# EAGLE board connectionBoxPCB (EAGLE 8.5.2)
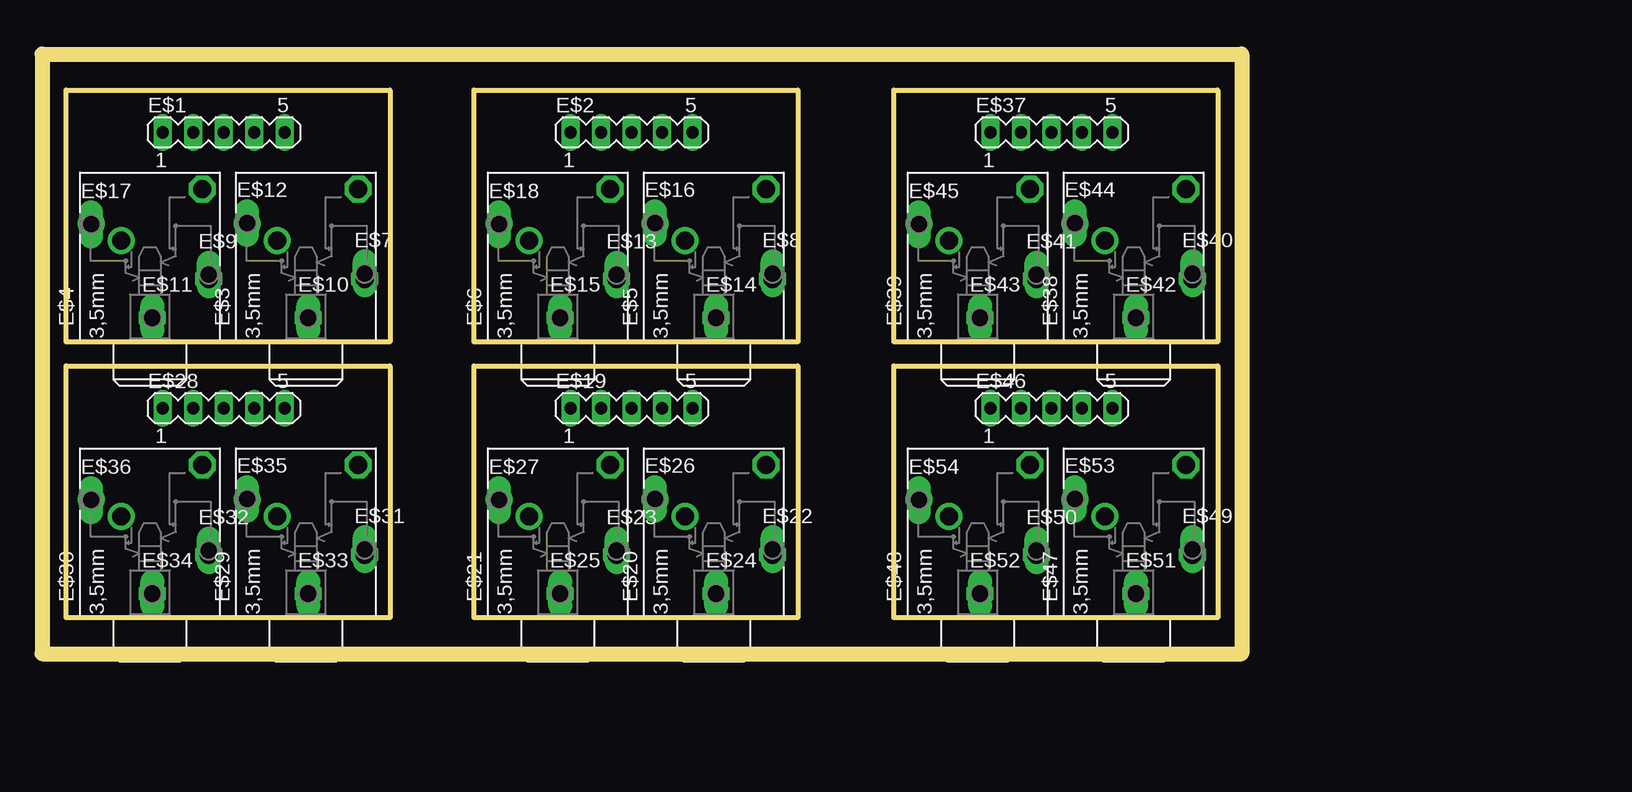
[diagram p0: board, top side]
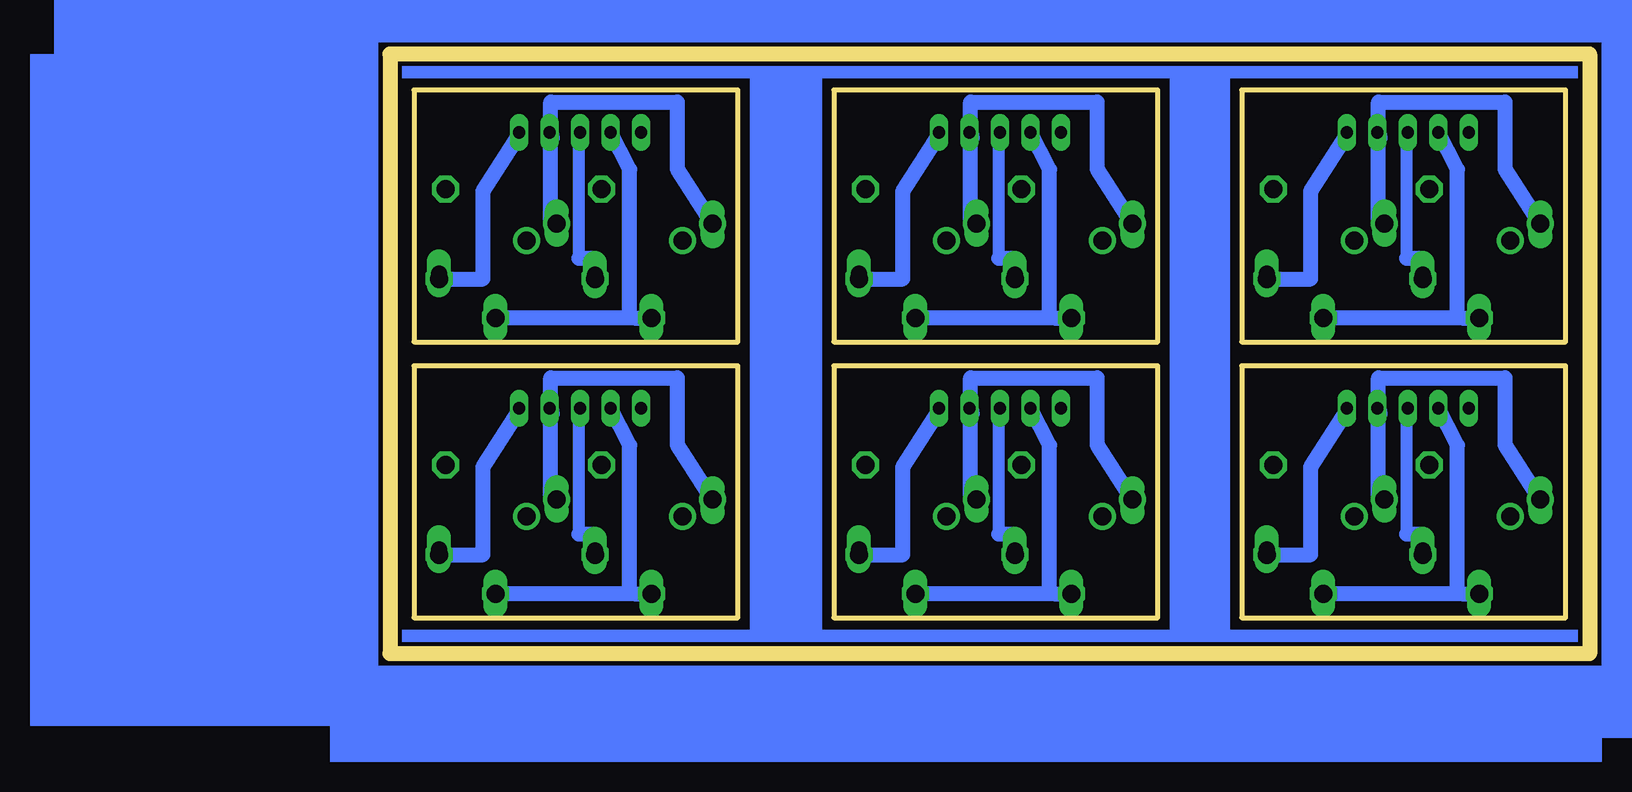
[diagram p1: board, bottom side, seen from below]

Size 100 x 50 mm. Coordinates in mm from the lower left corner, seen from the top.
Outline: 63,47 63,26 36,26 36,47 63,47
Outline: 29,47 29,26 2,26 2,47 29,47
Outline: 63,24 63,3 36,3 36,24 63,24
Outline: 29,24 29,3 2,3 2,24 29,24
Outline: 0,50 100,50 100,0 0,0 0,50
Outline: 98,47 98,26 71,26 71,47 98,47
Outline: 98,24 98,3 71,3 71,24 98,24
Copper layers (1*16): Top 0.035mm / dielectric 1.5mm / Bottom 0.035mm
Design rules "default": minimum track width 10mil, minimum drill 24mil, track to track 8mil, track to pad 8mil, pad to pad 8mil, via to via 8mil, smd to smd 8mil, copper to edge 40mil, drill to drill 8mil, minimum pad ring 10mil, minimum via ring 8mil, stop-mask expansion 4mil, vias tented up to drill 0mil, thermal gap 10mil

## Footprints (pad centres in the part's own frame; a part is rotated, then mirrored left to right if it is on the bottom)
MA05-1 = drill 1.016 long: 1 -5.08,0; 2 -2.54,0; 3 0,0; 4 2.54,0; 5 5.08,0
PG203J = drill 1.499 octagon: 1 -5.004,-0.203; 4 5.74,-4.369; 5 -1.753,-4.902 | drill 1.499: 2 2.845,4.902; 3 1.448,2.388
P1-13Y = drill 1.321 pad 1.905 long: TP 0,0

## Placement (x,y rotation side)
E$1  [MA05-1]  15.15,43.46 0 top
E$2  [MA05-1]  49.15,43.46 0 top
E$3  [PG203J]  22,33 90 top
E$4  [PG203J]  9,33 90 top
E$5  [PG203J]  56,33 90 top
E$6  [PG203J]  43,33 90 top
E$7  [P1-13Y]  26.9,31.7 0 top
E$8  [P1-13Y]  60.9,31.7 0 top
E$9  [P1-13Y]  13.9,31.6 0 top
E$10  [P1-13Y]  22.2,28 0 top
E$11  [P1-13Y]  9.2,28 0 top
E$12  [P1-13Y]  17.1,35.9 0 top
E$13  [P1-13Y]  47.9,31.6 0 top
E$14  [P1-13Y]  56.2,28 0 top
E$15  [P1-13Y]  43.2,28 0 top
E$16  [P1-13Y]  51.1,35.9 0 top
E$17  [P1-13Y]  4.1,35.8 0 top
E$18  [P1-13Y]  38.1,35.8 0 top
E$19  [MA05-1]  49.15,20.46 0 top
E$20  [PG203J]  56,10 90 top
E$21  [PG203J]  43,10 90 top
E$22  [P1-13Y]  60.9,8.7 0 top
E$23  [P1-13Y]  47.9,8.6 0 top
E$24  [P1-13Y]  56.2,5 0 top
E$25  [P1-13Y]  43.2,5 0 top
E$26  [P1-13Y]  51.1,12.9 0 top
E$27  [P1-13Y]  38.1,12.8 0 top
E$28  [MA05-1]  15.15,20.46 0 top
E$29  [PG203J]  22,10 90 top
E$30  [PG203J]  9,10 90 top
E$31  [P1-13Y]  26.9,8.7 0 top
E$32  [P1-13Y]  13.9,8.6 0 top
E$33  [P1-13Y]  22.2,5 0 top
E$34  [P1-13Y]  9.2,5 0 top
E$35  [P1-13Y]  17.1,12.9 0 top
E$36  [P1-13Y]  4.1,12.8 0 top
E$37  [MA05-1]  84.15,43.46 0 top
E$38  [PG203J]  91,33 90 top
E$39  [PG203J]  78,33 90 top
E$40  [P1-13Y]  95.9,31.7 0 top
E$41  [P1-13Y]  82.9,31.6 0 top
E$42  [P1-13Y]  91.2,28 0 top
E$43  [P1-13Y]  78.2,28 0 top
E$44  [P1-13Y]  86.1,35.9 0 top
E$45  [P1-13Y]  73.1,35.8 0 top
E$46  [MA05-1]  84.15,20.46 0 top
E$47  [PG203J]  91,10 90 top
E$48  [PG203J]  78,10 90 top
E$49  [P1-13Y]  95.9,8.7 0 top
E$50  [P1-13Y]  82.9,8.6 0 top
E$51  [P1-13Y]  91.2,5 0 top
E$52  [P1-13Y]  78.2,5 0 top
E$53  [P1-13Y]  86.1,12.9 0 top
E$54  [P1-13Y]  73.1,12.8 0 top

## Library data of the parts
E$1 E$2 E$19 E$28 E$37 E$46 = con-lstb
E$3-E$6 E$20 E$21 E$29 E$30 E$38 E$39 E$47 E$48 = con-hirschmann
E$7-E$18 E$22-E$27 E$31-E$36 E$40-E$45 E$49-E$54 = testpad

## Nets
S$2: E$1.4 E$3.2 E$4.2
S$3: E$1.3 E$4.5
S$4: E$2.4 E$5.2 E$6.2
S$5: E$1.5 E$3.5
S$7: E$2.3 E$6.5
S$8: E$2.5 E$5.5
S$9: E$2.2 E$5.1 E$6.1
S$10: E$1.2 E$3.1 E$4.1
S$11: E$19.4 E$20.2 E$21.2
S$12: E$19.3 E$21.5
S$13: E$19.5 E$20.5
S$14: E$19.2 E$20.1 E$21.1
S$15: E$28.4 E$29.2 E$30.2
S$16: E$28.3 E$30.5
S$17: E$28.5 E$29.5
S$18: E$28.2 E$29.1 E$30.1
S$19: E$37.4 E$38.2 E$39.2
S$20: E$37.3 E$39.5
S$21: E$37.5 E$38.5
S$22: E$37.2 E$38.1 E$39.1
S$23: E$46.4 E$47.2 E$48.2
S$24: E$46.3 E$48.5
S$25: E$46.5 E$47.5
S$26: E$46.2 E$47.1 E$48.1

## Tracks (layer width: path | path; a pad name or v marks a point on that pad's centre or on a via)
S$2
  Bottom 1.27: E$3.2 17.45,36 17.6,36.15 17.6,43 17.45,43 17.5,43.25 E$1.4 17.6,43.2 17.6,46 7.05,46 7.05,40.4 4.25,36 E$4.2
S$3
  Bottom 1.016: 15.24,32.96 15.24,43.37
  Bottom 1.27: 15.24,32.96 13.9,32.96 13.9,31.85 14,31.25 E$4.5 | E$1.3 15.24,43.37
S$4
  Bottom 1.27: E$5.2 51.45,36 51.6,36.15 51.6,43 51.45,43 51.5,43.25 E$2.4 51.6,43.2 51.6,46 41.05,46 41.05,40.4 38.25,36 E$6.2
S$5
  Bottom 1.27: E$1.5 20.25,43.25 23.25,38.55 23.25,31.25 26.75,31.25 E$3.5
S$7
  Bottom 1.016: 49.24,32.96 49.24,43.37
  Bottom 1.27: 49.24,32.96 47.9,32.96 47.9,31.85 48,31.25 E$6.5 | E$2.3 49.24,43.37
S$8
  Bottom 1.27: E$2.5 54.25,43.25 57.25,38.55 57.25,31.25 60.75,31.25 E$5.5
S$9
  Bottom 1.27: 45,40.39 | 45,28 45,40.39 | 45,40.39 E$2.2 | 45,28 44.65,28 E$6.1 | 45,28 56,28 E$5.1
S$10
  Bottom 1.27: 11,40.39 | 11,28 11,40.39 | 11,40.39 E$1.2 | 11,28 10.65,28 E$4.1 | 11,28 22,28 E$3.1
S$11
  Bottom 1.27: E$20.2 51.45,13 51.6,13.15 51.6,20 51.45,20 51.5,20.25 E$19.4 51.6,20.2 51.6,23 41.05,23 41.05,17.4 38.25,13 E$21.2
S$12
  Bottom 1.016: 49.24,9.96 49.24,20.37
  Bottom 1.27: 49.24,9.96 47.9,9.96 47.9,8.85 48,8.25 E$21.5 | E$19.3 49.24,20.37
S$13
  Bottom 1.27: E$19.5 54.25,20.25 57.25,15.55 57.25,8.25 60.75,8.25 E$20.5
S$14
  Bottom 1.27: 45,17.39 | 45,5 45,17.39 | 45,17.39 E$19.2 | 45,5 44.65,5 E$21.1 | 45,5 56,5 E$20.1
S$15
  Bottom 1.27: E$29.2 17.45,13 17.6,13.15 17.6,20 17.45,20 17.5,20.25 E$28.4 17.6,20.2 17.6,23 7.05,23 7.05,17.4 4.25,13 E$30.2
S$16
  Bottom 1.016: 15.24,9.96 15.24,20.37
  Bottom 1.27: 15.24,9.96 13.9,9.96 13.9,8.85 14,8.25 E$30.5 | E$28.3 15.24,20.37
S$17
  Bottom 1.27: E$28.5 20.25,20.25 23.25,15.55 23.25,8.25 26.75,8.25 E$29.5
S$18
  Bottom 1.27: 11,17.39 | 11,5 11,17.39 | 11,17.39 E$28.2 | 11,5 10.65,5 E$30.1 | 11,5 22,5 E$29.1
S$19
  Bottom 1.27: E$38.2 86.45,36 86.6,36.15 86.6,43 86.45,43 86.5,43.25 E$37.4 86.6,43.2 86.6,46 76.05,46 76.05,40.4 73.25,36 E$39.2
S$20
  Bottom 1.016: 84.24,32.96 84.24,43.37
  Bottom 1.27: 84.24,32.96 82.9,32.96 82.9,31.85 83,31.25 E$39.5 | E$37.3 84.24,43.37
S$21
  Bottom 1.27: E$37.5 89.25,43.25 92.25,38.55 92.25,31.25 95.75,31.25 E$38.5
S$22
  Bottom 1.27: 80,40.39 | 80,28 80,40.39 | 80,40.39 E$37.2 | 80,28 79.65,28 E$39.1 | 80,28 91,28 E$38.1
S$23
  Bottom 1.27: E$47.2 86.45,13 86.6,13.15 86.6,20 86.45,20 86.5,20.25 E$46.4 86.6,20.2 86.6,23 76.05,23 76.05,17.4 73.25,13 E$48.2
S$24
  Bottom 1.016: 84.24,9.96 84.24,20.37
  Bottom 1.27: 84.24,9.96 82.9,9.96 82.9,8.85 83,8.25 E$48.5 | E$46.3 84.24,20.37
S$25
  Bottom 1.27: E$46.5 89.25,20.25 92.25,15.55 92.25,8.25 95.75,8.25 E$47.5
S$26
  Bottom 1.27: 80,17.39 | 80,5 80,17.39 | 80,17.39 E$46.2 | 80,5 79.65,5 E$48.1 | 80,5 91,5 E$47.1
(copper drawn outside any net)
  shapes: Bottom area x12

## Text on the board
tTest: S | S | S | S | G | G | G | V | V | V | V | S | S | S | S | G | G | G | G | G | V | V | V | V | S | S | S | S | G | G | G | G | V | V | V | V | S | S | S | S | G | G | G | G | V | V | V | V